# EAGLE board Sensor LF (EAGLE 9.6.2)
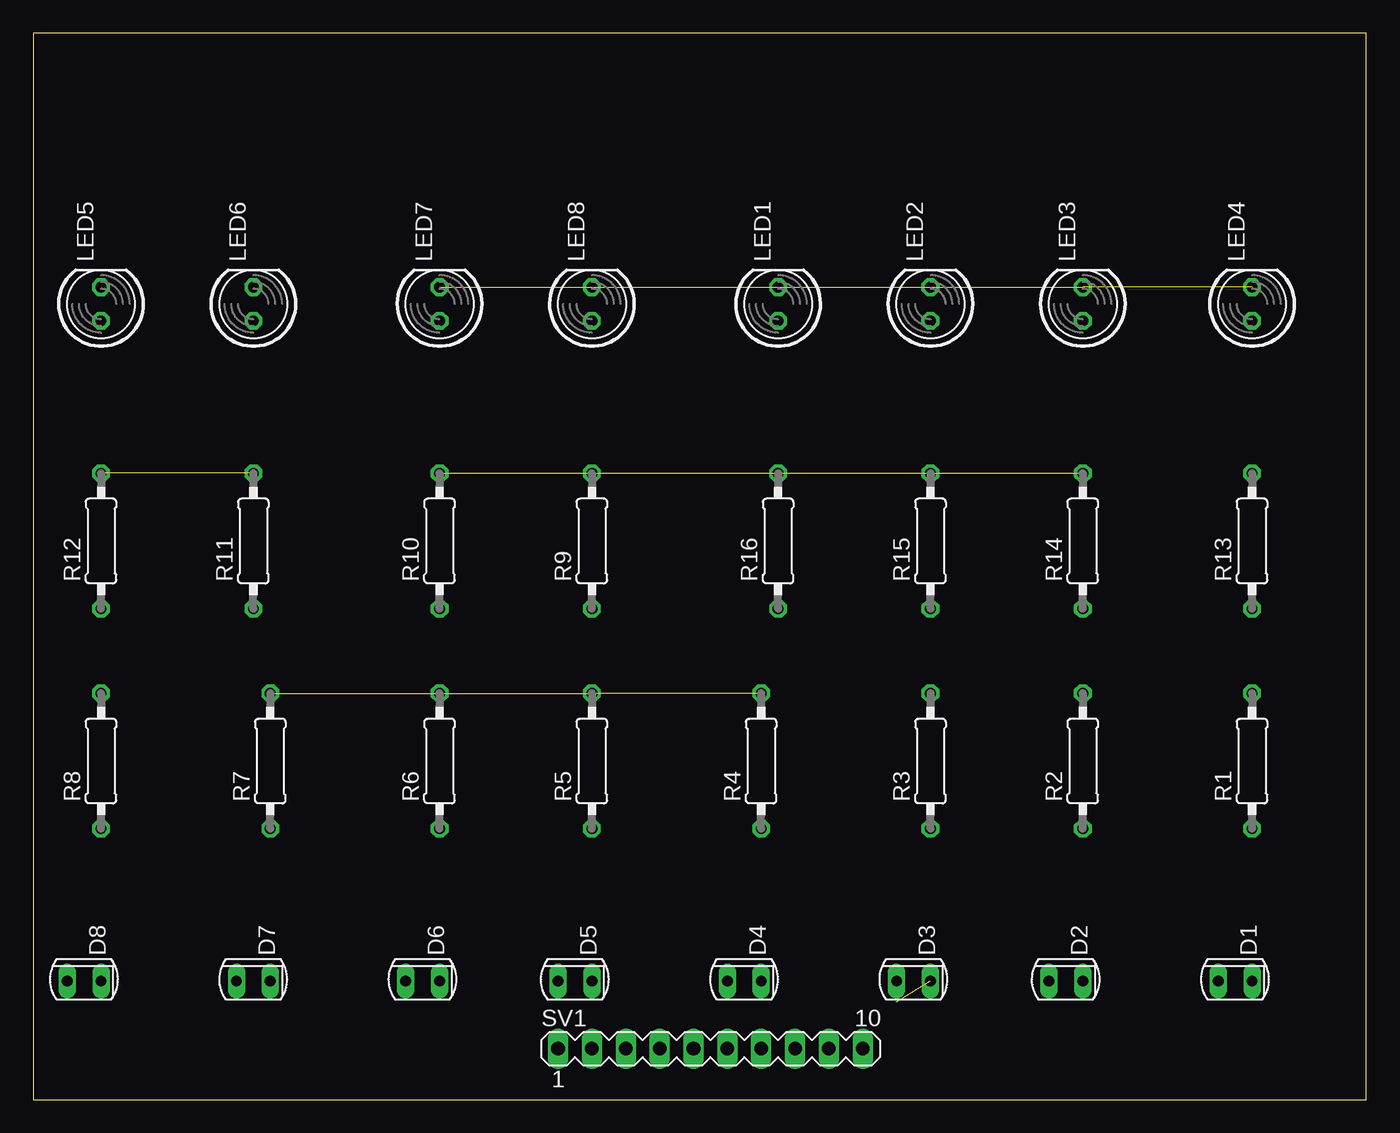
[diagram p0: board, top side]
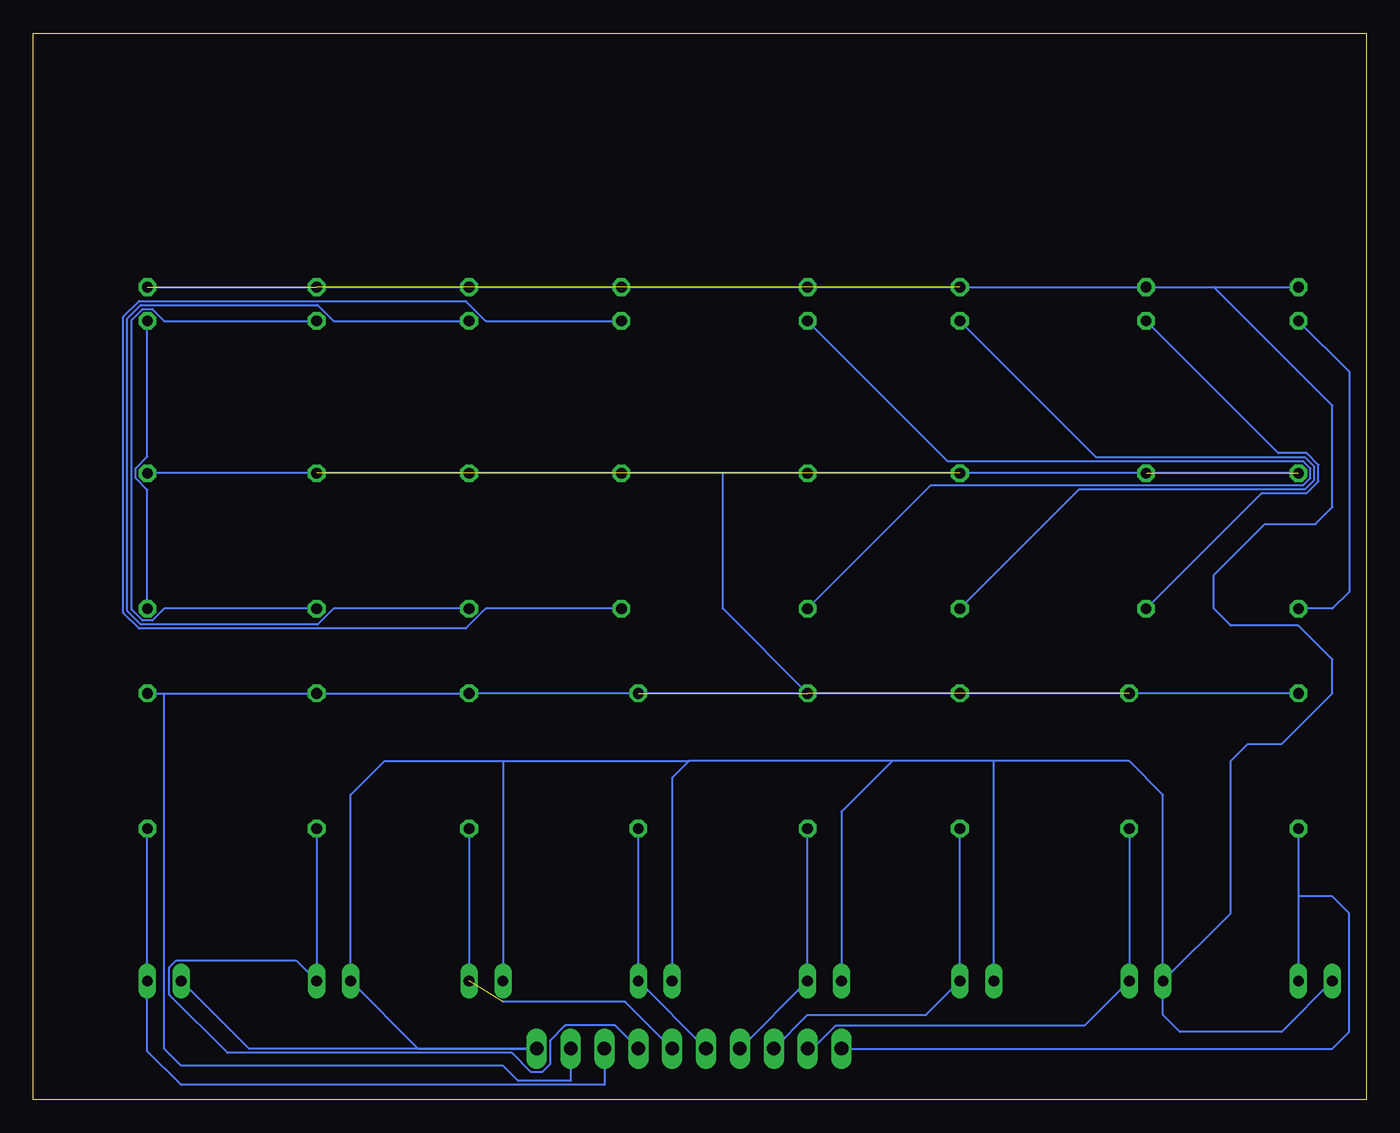
[diagram p1: board, bottom side, seen from below]

Size 100 x 80 mm. Coordinates in mm from the lower left corner, seen from the top.
Outline: 0,0 100,0 100,80 0,80 0,0
Copper layers (1*16): Top 0.035mm / dielectric 1.5mm / Bottom 0.035mm
Design rules "default": minimum track width 6mil, minimum drill 0.35mm, track to track 6mil, track to pad 6mil, pad to pad 6mil, via to via 6mil, smd to smd 6mil, copper to edge 40mil, drill to drill 6mil, minimum pad ring 10mil, minimum via ring 8mil, stop-mask expansion 4mil, vias tented up to drill 0mil, thermal gap 10mil

## Footprints (pad centres in the part's own frame; a part is rotated, then mirrored left to right if it is on the bottom)
SFH225 = drill 0.813 long: A 0,1.27; K 0,-1.27
LED5MM = drill 0.813 octagon: A -1.27,0; K 1.27,0
0207/10 = drill 0.813 octagon: 1 -5.08,0; 2 5.08,0
MA10-1 = drill 1.016 long: 1 -11.43,0; 2 -8.89,0; 3 -6.35,0; 4 -3.81,0; 5 -1.27,0; 6 1.27,0; 7 3.81,0; 8 6.35,0; 9 8.89,0; 10 11.43,0

## Placement (x,y rotation side)
D1  PhotoDioda  [SFH225]  90.17,8.89 90 top
D2  PhotoDioda  [SFH225]  77.47,8.89 90 top
D3  PhotoDioda  [SFH225]  66.04,8.89 90 top
D4  PhotoDioda  [SFH225]  53.34,8.89 90 top
D5  PhotoDioda  [SFH225]  40.64,8.89 90 top
D6  PhotoDioda  [SFH225]  29.21,8.89 90 top
D7  PhotoDioda  [SFH225]  16.51,8.89 90 top
D8  PhotoDioda  [SFH225]  3.81,8.89 90 top
LED1  LED putih SB  [LED5MM]  55.88,59.69 90 top
LED2  LED putih SB  [LED5MM]  67.31,59.69 90 top
LED3  LED putih SB  [LED5MM]  78.74,59.69 90 top
LED4  LED putih SB  [LED5MM]  91.44,59.69 90 top
LED5  LED putih SB  [LED5MM]  5.08,59.69 90 top
LED6  LED putih SB  [LED5MM]  16.51,59.69 90 top
LED7  LED putih SB  [LED5MM]  30.48,59.69 90 top
LED8  LED putih SB  [LED5MM]  41.91,59.69 90 top
R1  [0207/10]  91.44,25.4 90 top
R2  [0207/10]  78.74,25.4 90 top
R3  [0207/10]  67.31,25.4 90 top
R4  [0207/10]  54.61,25.4 90 top
R5  [0207/10]  41.91,25.4 90 top
R6  [0207/10]  30.48,25.4 90 top
R7  [0207/10]  17.78,25.4 90 top
R8  [0207/10]  5.08,25.4 90 top
R9  330  [0207/10]  41.91,41.91 90 top
R10  330  [0207/10]  30.48,41.91 90 top
R11  330  [0207/10]  16.51,41.91 90 top
R12  330  [0207/10]  5.08,41.91 90 top
R13  330  [0207/10]  91.44,41.91 90 top
R14  330  [0207/10]  78.74,41.91 90 top
R15  330  [0207/10]  67.31,41.91 90 top
R16  330  [0207/10]  55.88,41.91 90 top
SV1  [MA10-1]  50.8,3.81 0 top

## Library data of the parts
D1-D8 = opto-trans-siemens
LED1-LED8 = led
R1-R16 = resistor
SV1 = con-lstb

## Nets
GND: D1.A D2.A D3.A D4.A D5.A D6.A D7.A D8.A LED1.K LED2.K LED3.K LED4.K LED5.K LED6.K LED7.K LED8.K SV1.10
N$1: LED7.A R10.1
N$2: D7.K R7.1 SV1.2
N$3: D8.K R8.1 SV1.1
N$4: D1.K R1.1 SV1.8
N$5: D2.K R2.1 SV1.7
N$6: D3.K R3.1 SV1.6
N$7: D5.K R5.1 SV1.4
N$8: D4.K R4.1 SV1.5
N$9: D6.K R6.1 SV1.3
N$10: LED6.A R11.1
N$11: LED5.A R12.1
N$12: LED4.A R13.1
N$13: LED3.A R14.1
N$14: LED2.A R15.1
N$15: LED1.A R16.1
N$16: LED8.A R9.1
VCC: R1.2 R2.2 R3.2 R4.2 R5.2 R6.2 R7.2 R8.2 R9.2 R10.2 R11.2 R12.2 R13.2 R14.2 R15.2 R16.2 SV1.9

## Tracks (layer width: path | path; a pad name or v marks a point on that pad's centre or on a via)
GND  (5 unrouted)
  Bottom 0.152: D1.A 83.82,3.81 SV1.10 71.12,3.81 D2.A 76.2,22.86 73.66,25.4 64.77,25.4 | LED4.K LED6.K 11.43,60.96 | D8.A 6.35,5.08 13.97,5.08 15.24,6.35 D7.A | D7.A 15.24,22.86 17.78,25.4 27.94,25.4 | D5.A 39.37,21.59 35.56,25.4 | 27.94,25.4 35.56,25.4 | D6.A 27.94,25.4 | 35.56,25.4 50.8,25.4 | 50.8,25.4 52.07,24.13 D4.A | 11.43,60.96 LED5.K | D7.A 10.16,13.97 10.16,25.4 8.89,26.67 6.35,26.67 2.54,30.48 2.54,33.02 5.08,35.56 10.16,35.56 11.43,36.83 11.43,39.37 7.62,43.18 3.81,43.18 2.54,44.45 2.54,52.07 11.43,60.96 | 64.77,25.4 50.8,25.4 | 64.77,25.4 D3.A
N$1
  Bottom 0.152: R10.1 21.51,45.8 4.59,45.8 3.89,46.5 3.89,47.48 4.59,48.18 20.24,48.18 LED7.A
N$2
  Bottom 0.152: R7.1 D7.K 21.11,5.56 39.78,5.56 41.53,3.81 SV1.2
N$3
  Bottom 0.152: R8.1 5.08,15.24 | 5.08,15.24 D8.K | SV1.1 2.54,3.81 1.27,5.08 1.27,13.97 2.54,15.24 5.08,15.24
N$4
  Bottom 0.152: R1.1 D1.K 91.44,3.63 88.9,1.09 57.15,1.09 SV1.8
N$5
  Bottom 0.152: R2.1 D2.K 80.29,10.44 89.27,10.44 89.79,9.92 89.79,7.86 85.43,3.5 64.09,3.5 62.64,2.06 61.82,2.06 61.24,2.64 61.24,4.42 60.1,5.56 56.36,5.56 SV1.7
N$6  (1 unrouted)
  Bottom 0.152: R3.1 D3.K | SV1.6 55.6,7.34 64.77,7.34
N$7
  Bottom 0.152: SV1.4 D5.K R5.1
N$8
  Bottom 0.152: SV1.5 D4.K R4.1
N$9
  Bottom 0.152: SV1.3 41.91,6.35 33.02,6.35 D6.K R6.1
N$10
  Bottom 0.152: R11.1 7.85,45.49 4.46,45.49 3.58,46.37 3.58,47.61 4.46,48.49 6.58,48.49 LED6.A
N$11
  Bottom 0.152: R12.1 2.54,36.83 1.27,38.1 1.27,54.61 LED5.A
N$12
  Bottom 0.152: R13.1 91.44,45.73 92.33,46.62 92.33,47.36 91.44,48.25 LED4.A
N$13
  Bottom 0.152: R14.1 90.18,36.83 91.07,35.94 91.81,35.94 92.63,36.77 92.63,58.48 91.81,59.31 91.07,59.31 90.18,58.42 LED3.A
N$14
  Bottom 0.152: LED2.A 77.48,58.42 78.68,59.61 91.93,59.61 92.94,58.61 92.94,36.64 91.93,35.64 78.68,35.64 77.48,36.83 R15.1
N$15
  Bottom 0.152: R16.1 66.05,36.83 67.55,35.33 92.06,35.33 93.24,36.51 93.24,58.74 92.06,59.92 67.55,59.92 66.05,58.42 LED1.A
N$16
  Bottom 0.152: R9.1 32.64,46.1 4.71,46.1 4.19,46.62 4.19,47.36 4.71,47.88 31.37,47.88 LED8.A
VCC  (8 unrouted)
  Bottom 0.152: R1.2 90.17,30.48 | 90.17,30.48 R2.2 R3.2 R4.2 R8.2 | R12.2 48.26,46.99 | 48.26,46.99 R15.2 R13.2 | R5.2 48.26,36.83 48.26,46.99 | 60.07,3.81 SV1.9 59.69,1.4 63.63,1.4 64.77,2.54 88.9,2.54 90.17,3.81 90.17,30.48